# EAGLE board Bus Controller (EAGLE 5.03)
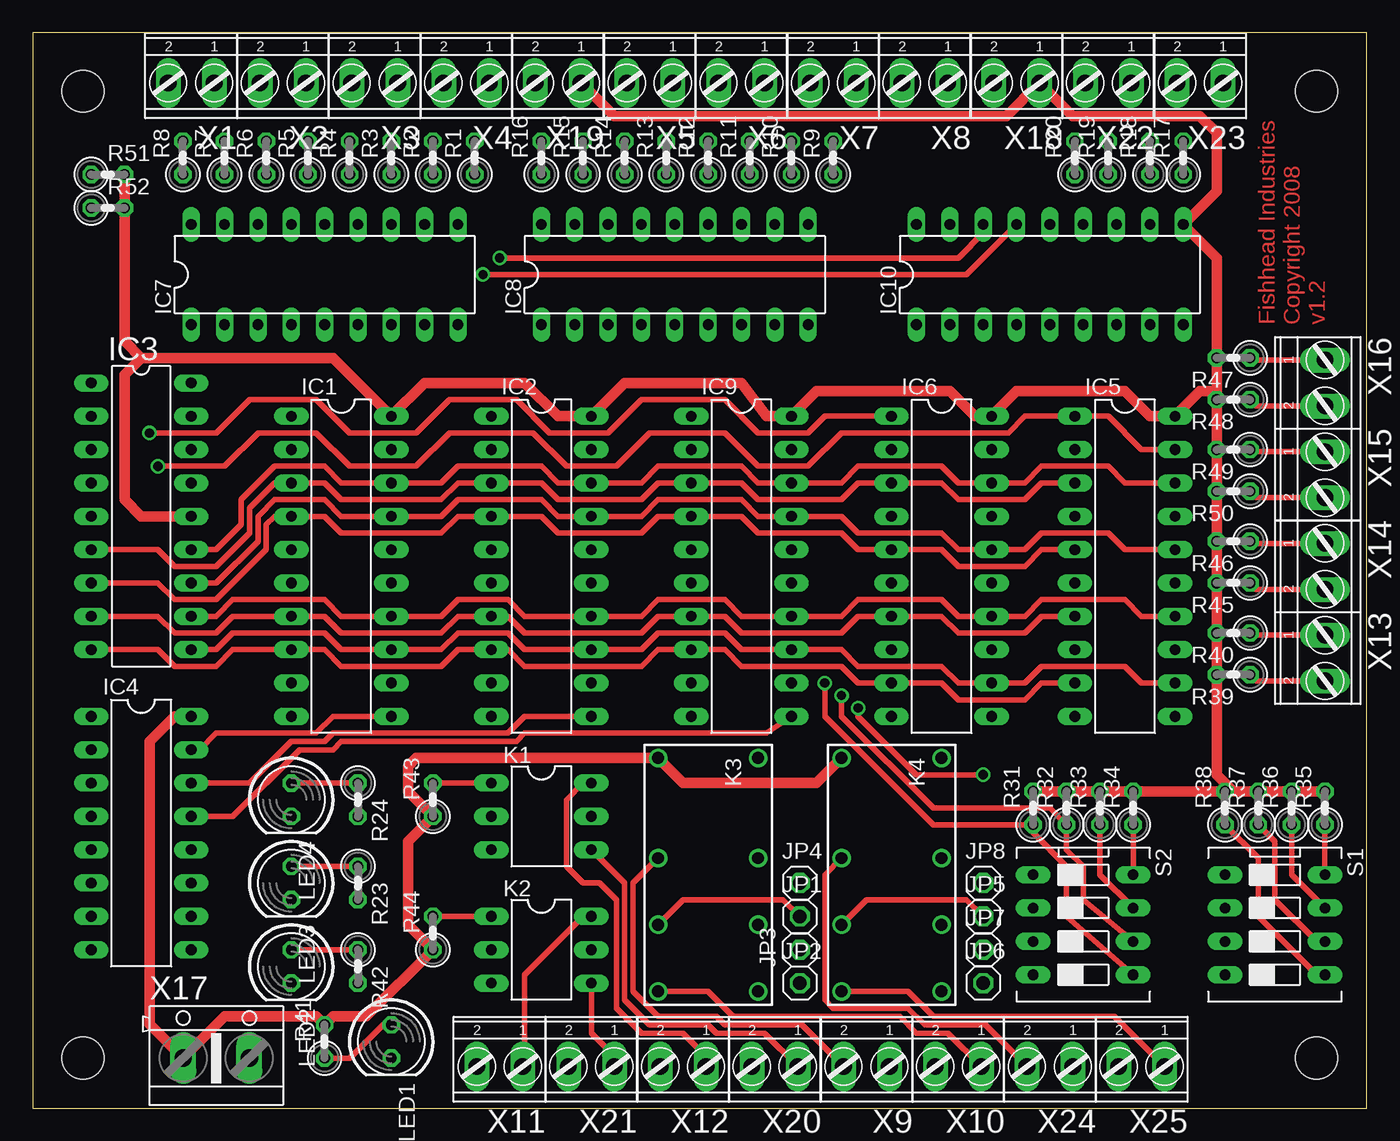
[diagram p0: board, top side]
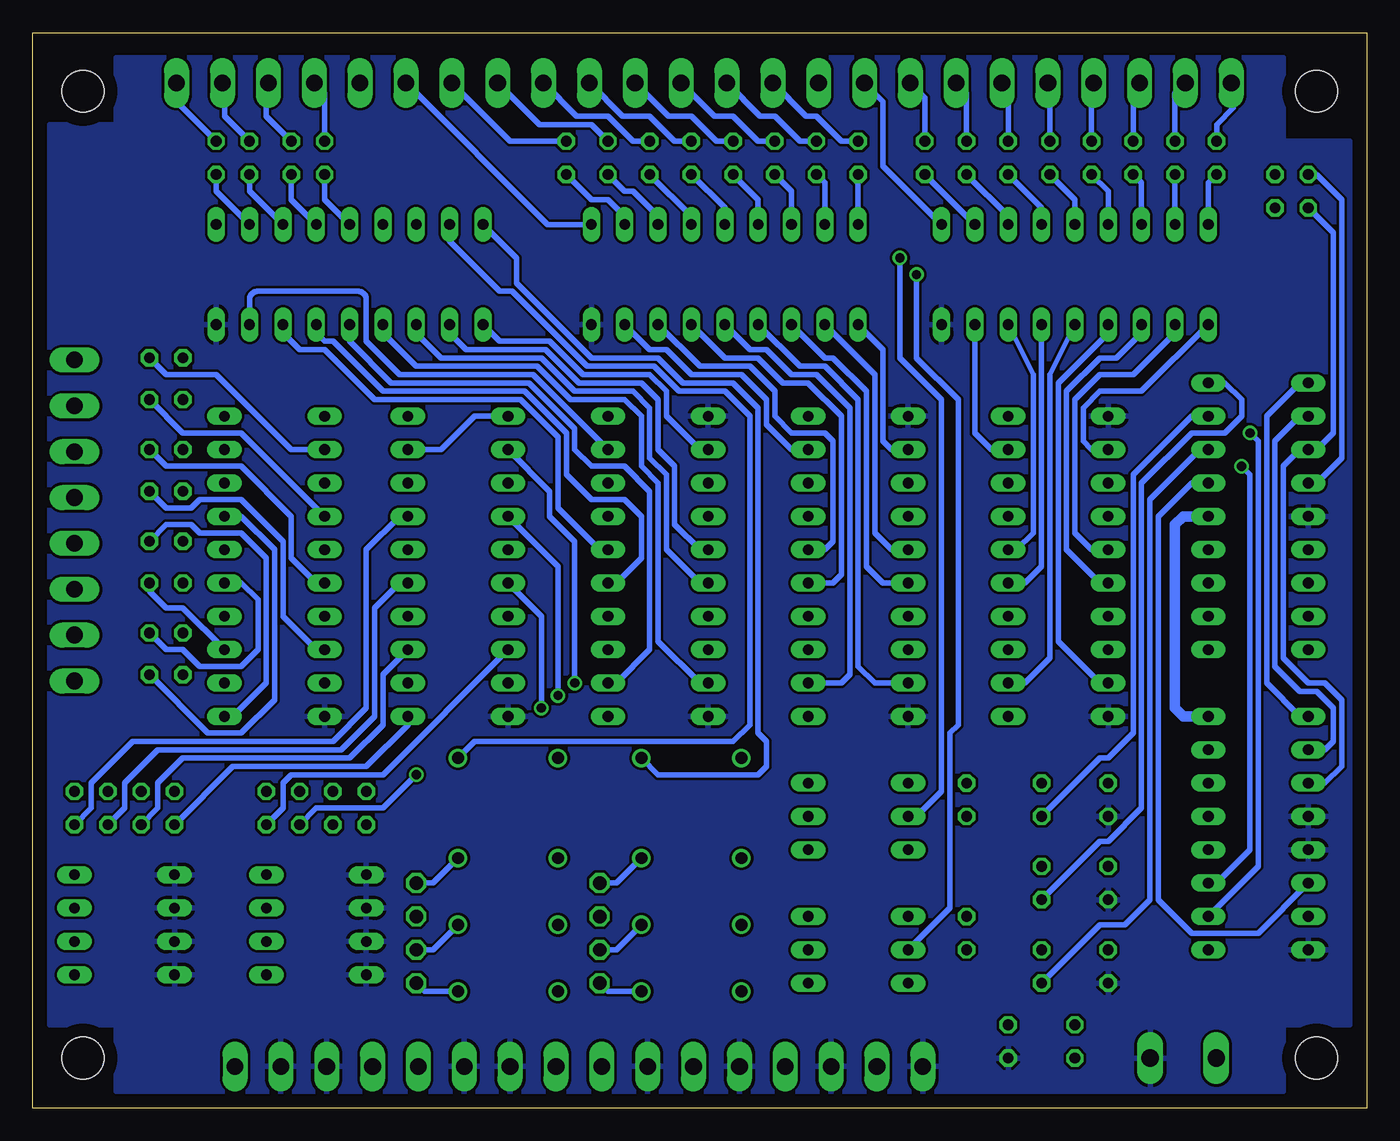
[diagram p1: board, bottom side, seen from below]

Size 101.6 x 81.92 mm. Coordinates in mm from the lower left corner, seen from the top.
Outline: 0,0 101.6,0 101.6,81.92 0,81.92 0,0
Copper layers (1*16): Top 0.035mm / dielectric 1.5mm / Bottom 0.035mm
Design rules "default *": minimum track width 10mil, minimum drill 24mil, track to track 8mil, track to pad 16mil, pad to pad 8mil, via to via 8mil, smd to smd 8mil, copper to edge 40mil, drill to drill 8mil, minimum pad ring 10mil, minimum via ring 8mil, stop-mask expansion 4mil, vias tented up to drill 0mil, thermal gap 10mil
Holes 3.2 mm at 3.81,3.81 97.79,3.81 97.79,77.47 3.81,77.47

## Footprints (pad centres in the part's own frame; a part is rotated, then mirrored left to right if it is on the bottom)
DIL20 = drill 0.813 long: 1 -11.43,-3.81; 2 -8.89,-3.81; 3 -6.35,-3.81; 4 -3.81,-3.81; 5 -1.27,-3.81; 6 1.27,-3.81; 7 3.81,-3.81; 8 6.35,-3.81; 9 8.89,-3.81; 10 11.43,-3.81; 11 11.43,3.81; 12 8.89,3.81; 13 6.35,3.81; 14 3.81,3.81; 15 1.27,3.81; 16 -1.27,3.81; 17 -3.81,3.81; 18 -6.35,3.81; 19 -8.89,3.81; 20 -11.43,3.81
DIL18 = drill 0.813 long: 1 -10.16,-3.81; 2 -7.62,-3.81; 3 -5.08,-3.81; 4 -2.54,-3.81; 5 0,-3.81; 6 2.54,-3.81; 7 5.08,-3.81; 8 7.62,-3.81; 9 10.16,-3.81; 10 10.16,3.81; 11 7.62,3.81; 12 5.08,3.81; 13 2.54,3.81; 14 0,3.81; 15 -2.54,3.81; 16 -5.08,3.81; 17 -7.62,3.81; 18 -10.16,3.81
DIL16 = drill 0.813 long: 1 -8.89,-3.81; 2 -6.35,-3.81; 3 -3.81,-3.81; 4 -1.27,-3.81; 5 1.27,-3.81; 6 3.81,-3.81; 7 6.35,-3.81; 8 8.89,-3.81; 9 8.89,3.81; 10 6.35,3.81; 11 3.81,3.81; 12 1.27,3.81; 13 -1.27,3.81; 14 -3.81,3.81; 15 -6.35,3.81; 16 -8.89,3.81
1X01 = drill 1.016 octagon: 1 0,0
DIL06 = drill 0.813 long: 1 -2.54,-3.81; 2 0,-3.81; 3 2.54,-3.81; 4 2.54,3.81; 5 0,3.81; 6 -2.54,3.81
DS2Y = drill 0.9 round: 1 -8.89,-3.81; 4 -1.27,-3.81; 6 3.81,-3.81; 8 8.89,-3.81; 9 8.89,3.81; 11 3.81,3.81; 13 -1.27,3.81; 16 -8.89,3.81
LED5MM = drill 0.813 octagon: A -1.27,0; K 1.27,0
0207/2V = drill 0.813 octagon: 1 -1.27,0; 2 1.27,0
DS-04 = drill 0.813 long: 1 -3.81,-3.81; 2 -1.27,-3.81; 3 1.27,-3.81; 4 3.81,-3.81; 5 3.81,3.81; 6 1.27,3.81; 7 -1.27,3.81; 8 -3.81,3.81
AK550/2 = drill 1.27 long: 1 -1.75,0; 2 1.75,0
AK500/2 = drill 1.321 long: 1 -2.515,0; 2 2.515,0

## Placement (x,y rotation side)
IC1  74LS374N  [DIL20]  23.5,41.27 270 top
IC2  74LS374N  [DIL20]  38.73,41.27 270 top
IC3  PIC16F628P  [DIL18]  8.26,45.09 270 top
IC4  74LS138N  [DIL16]  8.26,20.95 270 top
IC5  74S244N  [DIL20]  83.19,41.27 270 top
IC6  74S244N  [DIL20]  69.22,41.27 270 top
IC7  DRIVER1  [DIL18]  22.23,63.5 0 top
IC8  DRIVER2  [DIL18]  48.9,63.5 0 top
IC9  74LS374N  [DIL20]  53.98,41.27 270 top
IC10  DRIVER3  [DIL18]  77.47,63.5 0 top
JP1  R1_NC1  [1X01]  58.42,14.61 0 top
JP2  R1_NO2  [1X01]  58.42,9.53 0 top
JP3  R1_NC2  [1X01]  58.42,12.06 90 top
JP4  R1_COMMON2  [1X01]  58.42,17.14 0 top
JP5  R2_NC1  [1X01]  72.39,14.61 0 top
JP6  R2_NO2  [1X01]  72.39,9.53 0 top
JP7  R2_NC2  [1X01]  72.39,12.06 0 top
JP8  R2_COMMON2  [1X01]  72.39,17.14 0 top
K1  ISO1  [DIL06]  38.73,22.23 270 top
K2  ISO2  [DIL06]  38.73,12.06 270 top
K3  DS2Y-S-DC5V  [DS2Y]  51.44,17.78 270 top
K4  DS2Y-S-DC5V  [DS2Y]  65.41,17.78 270 top
LED1  POWER  [LED5MM]  27.3,5.08 270 top
LED2  STATUS  [LED5MM]  19.68,10.79 270 top
LED3  RUN 1  [LED5MM]  19.68,17.14 270 top
LED4  RUN 2  [LED5MM]  19.68,23.5 270 top
R1  220  [0207/2V]  33.66,72.39 90 top
R2  220  [0207/2V]  30.48,72.39 90 top
R3  220  [0207/2V]  27.3,72.39 90 top
R4  220  [0207/2V]  24.13,72.39 90 top
R5  220  [0207/2V]  20.95,72.39 90 top
R6  220  [0207/2V]  17.78,72.39 90 top
R7  220  [0207/2V]  14.61,72.39 90 top
R8  220  [0207/2V]  11.43,72.39 90 top
R9  220  [0207/2V]  60.96,72.39 90 top
R10  220  [0207/2V]  57.78,72.39 90 top
R11  220  [0207/2V]  54.61,72.39 90 top
R12  220  [0207/2V]  51.44,72.39 90 top
R13  220  [0207/2V]  48.26,72.39 90 top
R14  220  [0207/2V]  45.09,72.39 90 top
R15  220  [0207/2V]  41.91,72.39 90 top
R16  220  [0207/2V]  38.73,72.39 90 top
R17  220  [0207/2V]  87.63,72.39 90 top
R18  220  [0207/2V]  85.09,72.39 90 top
R19  220  [0207/2V]  81.92,72.39 90 top
R20  220  [0207/2V]  79.38,72.39 90 top
R23  220  [0207/2V]  24.77,17.14 270 top
R24  220  [0207/2V]  24.77,23.5 270 top
R31  4.7K  [0207/2V]  76.2,22.86 90 top
R32  4.7K  [0207/2V]  78.74,22.86 90 top
R33  4.7K  [0207/2V]  81.28,22.86 90 top
R34  4.7K  [0207/2V]  83.82,22.86 90 top
R35  4.7K  [0207/2V]  98.42,22.86 90 top
R36  4.7K  [0207/2V]  95.89,22.86 90 top
R37  4.7K  [0207/2V]  93.34,22.86 90 top
R38  4.7K  [0207/2V]  90.81,22.86 90 top
R39  4.7K  [0207/2V]  91.44,33.02 180 top
R40  4.7K  [0207/2V]  91.44,36.2 180 top
R41  220  [0207/2V]  22.23,5.08 90 top
R42  220  [0207/2V]  24.77,10.79 270 top
R43  220  [0207/2V]  30.48,23.5 90 top
R44  220  [0207/2V]  30.48,13.34 90 top
R45  4.7K  [0207/2V]  91.44,40.01 180 top
R46  4.7K  [0207/2V]  91.44,43.18 180 top
R47  4.7K  [0207/2V]  91.44,57.15 180 top
R48  4.7K  [0207/2V]  91.44,53.98 180 top
R49  4.7K  [0207/2V]  91.44,50.16 180 top
R50  4.7K  [0207/2V]  91.44,46.99 180 top
R51  4.7K  [0207/2V]  5.71,71.12 0 top
R52  4.7K  [0207/2V]  5.71,68.58 0 top
S1  MODE1  [DS-04]  94.61,13.97 270 top
S2  MODE2  [DS-04]  80.01,13.97 270 top
X1  OUT1  [AK550/2]  12.06,78.11 180 top
X2  OUT2  [AK550/2]  19.05,78.11 180 top
X3  OUT3  [AK550/2]  26.04,78.11 180 top
X4  OUT4  [AK550/2]  33.02,78.11 180 top
X5  OUT5  [AK550/2]  46.99,78.11 180 top
X6  OUT6  [AK550/2]  53.98,78.11 180 top
X7  OUT7  [AK550/2]  60.96,78.11 180 top
X8  OUT8  [AK550/2]  67.94,78.11 180 top
X9  SIG_IN1  [AK550/2]  63.5,3.17 180 top
X10  SIG_OUT1  [AK550/2]  70.48,3.17 180 top
X11  AC_IN2  [AK550/2]  35.56,3.17 180 top
X12  AC_IN1  [AK550/2]  49.53,3.17 180 top
X13  IN1  [AK550/2]  98.42,34.29 270 top
X14  IN2  [AK550/2]  98.42,41.27 270 top
X15  IN3  [AK550/2]  98.42,48.26 270 top
X16  IN4  [AK550/2]  98.42,55.24 270 top
X17  POWER  [AK500/2]  13.97,3.81 0 top
X18  OUT2_FB_CNTRL  [AK550/2]  74.93,78.11 180 top
X19  OUT1_FB_CNTRL  [AK550/2]  40.01,78.11 180 top
X20  ISO_1  [AK550/2]  56.52,3.17 180 top
X21  ISO_2  [AK550/2]  42.55,3.17 180 top
X22  OUT9  [AK550/2]  81.92,78.11 180 top
X23  OUT10  [AK550/2]  88.9,78.11 180 top
X24  SIG_IN2  [AK550/2]  77.47,3.17 180 top
X25  SIG_OUT2  [AK550/2]  84.45,3.17 180 top

## Library data of the parts
IC1 IC2 IC5 IC6 IC9 = 74xx-us
IC3 = microchip
IC4 = 74xx-eu
IC7 IC8 IC10 = uln-udn
JP1-JP8 = pinhead
K1-K4 = relay
LED1-LED4 = led
R1-R20 R23 R24 R31-R52 = resistor
S1 S2 = switch-dil
X1-X16 X18-X25 = con-ptr500+_v5
X17 = con-ptr500

## Nets
A0: IC3.1 IC4.1
A1: IC3.2 IC4.2
A2: IC3.3 IC4.3 R52.1
AC_IN1: K1.6 X12.1
AC_IN2: K2.6 X11.1
ADDR_EN: IC3.15 IC4.6
D0: IC1.3 IC2.3 IC3.6 IC5.3 IC6.3 IC9.3
D1: IC1.4 IC2.4 IC3.7 IC5.5 IC6.5 IC9.4
D2: IC1.7 IC2.7 IC3.8 IC5.7 IC6.7 IC9.7
D3: IC1.8 IC2.8 IC3.9 IC5.9 IC6.9 IC9.8
D4: IC1.13 IC2.13 IC3.10 IC5.12 IC6.12 IC9.13
D5: IC1.14 IC2.14 IC3.11 IC5.14 IC6.14 IC9.14
D6: IC1.17 IC2.17 IC3.12 IC5.16 IC6.16 IC9.17
D7: IC1.18 IC2.18 IC3.13 IC5.18 IC6.18 IC9.18
GND: IC1.1 IC1.10 IC2.1 IC2.10 IC3.5 IC4.4 IC4.5 IC4.8 IC5.10 IC6.10 IC7.9 IC8.9 IC9.1 IC9.10 IC10.9 LED1.K LED2.K LED3.K LED4.K S1.1 S1.2 S1.3 S1.4 S2.1 S2.2 S2.3 S2.4 X9.1 X10.2 X11.2 X12.2 X17.2 X20.2 X21.2 X24.1 X25.2
IN1: IC5.17 R39.1 X13.2
IN2: IC5.15 R40.1 X13.1
IN3: IC5.13 R45.1 X14.2
IN4: IC5.11 R46.1 X14.1
IN5: IC5.8 R50.1 X15.2
IN6: IC5.6 R49.1 X15.1
IN7: IC5.4 R48.1 X16.2
IN8: IC5.2 R47.1 X16.1
IN9: IC6.17 R35.1 S1.8
IN10: IC6.15 R36.1 S1.7
IN11: IC6.13 R37.1 S1.6
IN12: IC6.11 R38.1 S1.5
IN13: IC6.8 R34.1 S2.8
IN14: IC6.6 R33.1 S2.7
IN15: IC6.4 R32.1 S2.6
IN16: IC6.2 R31.1 S2.5
ISO_OUT1: K1.4 X20.1
ISO_OUT2: K2.4 X21.1
N$1: IC7.10 X19.2
N$2: IC3.4 R51.1
N$3: IC4.13 IC9.11
N$4: IC7.12 R2.1
N$5: IC2.11 IC4.14
N$6: IC1.11 IC4.15
N$7: IC9.19 IC10.8
N$8: IC9.16 IC10.7
N$9: IC9.15 IC10.6
N$10: IC9.12 IC10.5
N$11: IC9.9 IC10.4
N$12: IC7.18 R8.1
N$13: IC7.17 R7.1
N$14: IC7.16 R6.1
N$15: IC7.15 R5.1
N$16: IC9.6 IC10.3
N$17: IC8.12 R10.1
N$18: IC9.5 IC10.2
N$19: IC9.2 IC10.1
N$20: IC1.16 IC7.7
N$21: IC7.14 R4.1
N$22: IC1.19 IC7.8
N$23: IC1.2 IC7.1
N$24: IC1.5 IC7.2
N$25: IC1.6 IC7.3
N$26: IC1.9 IC7.4
N$27: IC1.12 IC7.5
N$28: IC1.15 IC7.6
N$29: IC2.19 IC8.8
N$30: IC7.13 R3.1
N$31: IC2.16 IC8.7
N$32: IC7.11 R1.1
N$33: IC2.15 IC8.6
N$34: IC10.16 K1.2
N$35: IC10.15 K2.2
N$37: LED4.A R24.1
N$38: LED3.A R23.1
N$44: IC8.10 X18.2
N$55: IC2.2 IC8.1
N$56: IC2.5 IC8.2
N$57: IC2.6 IC8.3
N$58: IC2.9 IC8.4
N$59: IC2.12 IC8.5
N$61: IC8.18 R16.1
N$62: IC8.17 R15.1
N$63: IC8.16 R14.1
N$64: IC8.15 R13.1
N$65: IC8.14 R12.1
N$66: IC8.13 R11.1
N$68: IC8.11 R9.1
N$71: LED1.A R41.1
N$75: IC10.14 R20.1
N$76: IC10.13 R19.1
N$77: IC10.12 R18.1
N$78: IC10.11 R17.1
N$105: IC4.10 IC6.1 IC6.19
N$106: LED2.A R42.1
N$107: K1.1 R43.2
N$108: K2.1 R44.2
N$109: IC4.11 IC5.1 IC5.19
OUT1: R8.2 X1.2
OUT2: R7.2 X1.1
OUT3: R6.2 X2.2
OUT4: R5.2 X2.1
OUT5: R4.2 X3.2
OUT6: R3.2 X3.1
OUT7: R2.2 X4.2
OUT8: R1.2 X4.1
OUT9: R16.2 X5.2
OUT10: R15.2 X5.1
OUT11: R14.2 X6.2
OUT12: R13.2 X6.1
OUT13: R12.2 X7.2
OUT14: R11.2 X7.1
OUT15: R10.2 X8.2
OUT16: R9.2 X8.1
OUT17: IC10.18 K3.16
OUT18: IC10.17 K4.16
OUT21: R20.2 X22.2
OUT22: R19.2 X22.1
OUT23: R18.2 X23.2
OUT24: R17.2 X23.1
R1_COMMON1: K3.4 X9.2
R1_COMMON2: JP4.1 K3.13
R1_COMMON3: JP8.1 K4.13
R1_COMMON4: K4.4 X24.2
R1_NC1: JP1.1 K3.6
R1_NC2: JP3.1 K3.11
R1_NC3: JP5.1 K4.6
R1_NC4: JP7.1 K4.11
R1_NO1: K3.8 X10.1
R1_NO2: JP2.1 K3.9
R1_NO3: JP6.1 K4.9
R1_NO4: K4.8 X25.1
RUN1: IC3.18 R23.2
RUN2: IC3.17 R24.2
STATUS: IC3.16 R42.2
VCC: IC1.20 IC2.20 IC3.14 IC4.16 IC5.20 IC6.20 IC9.20 IC10.10 K3.1 K4.1 R31.2 R32.2 R33.2 R34.2 R35.2 R36.2 R37.2 R38.2 R39.2 R40.2 R41.2 R43.1 R44.1 R45.2 R46.2 R47.2 R48.2 R49.2 R50.2 R51.2 R52.2 X17.1 X18.1 X19.1

## Tracks (layer width: path | path; a pad name or v marks a point on that pad's centre or on a via)
A0
  Bottom 0.406: IC4.1 5.08,29.84 7.62,32.38 7.62,52.7 5.08,55.24 IC3.1
A1
  Bottom 0.406: IC4.2 3.17,27.3 2.54,27.94 2.54,30.48 3.81,31.75 5.08,31.75 6.99,33.66 6.99,50.8 5.08,52.7 IC3.2
A2
  Bottom 0.406: IC4.3 3.17,24.77 1.91,26.04 1.91,31.11 3.17,32.38 4.45,32.38 6.35,34.29 6.35,48.9 5.08,50.16 IC3.3 3.81,50.16 2.54,51.44 2.54,66.67 R52.1
AC_IN1
  Top 0.406: K1.6 41.91,24.77 40.64,23.5 40.64,18.41 41.91,17.14 43.18,17.14 44.45,15.88 44.45,7.62 46.35,5.71 49.53,5.71 51.28,3.96 X12.1
AC_IN2
  Top 0.406: K2.6 41.91,14.61 37.47,10.16 37.47,3.17 X11.1
ADDR_EN
  Bottom 0.406: IC4.6 8.26,13.34 13.34,13.34 15.88,15.88 15.88,45.09 13.34,47.62 IC3.15
D0
  Top 0.406: IC5.3 76.83,47.62 75.56,46.35 70.48,46.35 69.22,47.62 IC6.3 62.87,47.62 61.59,46.35 55.24,46.35 53.98,47.62 IC9.3 47.62,47.62 46.35,46.35 40.01,46.35 38.73,47.62 IC2.3 32.38,47.62 31.11,46.35 23.5,46.35 22.23,47.62 IC1.3 18.41,47.62 16.51,45.72 16.51,43.81 13.97,41.27 10.79,41.27 9.53,42.55 IC3.6
D1
  Top 0.406: IC5.5 76.83,42.55 75.56,41.27 70.48,41.27 69.22,42.55 IC6.5 62.87,42.55 61.59,43.81 55.24,43.81 53.98,45.09 IC9.4 47.62,45.09 46.35,43.81 40.01,43.81 38.73,45.09 IC2.4 32.38,45.09 31.11,43.81 23.5,43.81 22.23,45.09 IC1.4 18.41,45.09 17.78,44.45 17.78,42.55 13.97,38.73 10.79,38.73 9.53,40.01 IC3.7
D2
  Top 0.406: IC5.7 76.83,37.47 75.56,36.2 70.48,36.2 69.22,37.47 IC6.7 62.87,37.47 61.59,36.2 53.98,36.2 52.7,37.47 IC9.7 47.62,37.47 46.35,36.2 37.47,36.2 36.2,37.47 IC2.7 32.38,37.47 31.11,36.2 23.5,36.2 22.23,37.47 IC1.7 15.24,37.47 13.97,36.2 10.79,36.2 9.53,37.47 IC3.8
D3
  Top 0.406: IC5.9 76.83,32.38 75.56,31.11 70.48,31.11 69.22,32.38 IC6.9 62.87,32.38 61.59,33.66 53.98,33.66 52.7,34.92 IC9.8 47.62,34.92 46.35,33.66 37.47,33.66 36.2,34.92 IC2.8 32.38,34.92 31.11,33.66 23.5,33.66 22.23,34.92 IC1.8 15.24,34.92 13.97,33.66 10.79,33.66 9.53,34.92 IC3.9
D4
  Top 0.406: IC5.12 84.45,32.38 83.19,33.66 76.83,33.66 75.56,32.38 IC6.12 70.48,32.38 69.22,33.66 62.87,33.66 61.59,34.92 IC9.13 53.98,34.92 52.7,36.2 47.62,36.2 46.35,34.92 IC2.13 37.47,34.92 36.2,36.2 32.38,36.2 31.11,34.92 IC1.13 23.5,34.92 22.23,36.2 15.24,36.2 13.97,34.92 IC3.10
D5
  Top 0.406: 75.56,37.47 IC6.14 | 75.56,37.47 76.83,38.73 83.19,38.73 84.45,37.47 IC5.14 | 75.56,37.47 70.48,37.47 69.22,38.73 62.87,38.73 61.59,37.47 IC9.14 53.98,37.47 52.7,38.73 47.62,38.73 46.35,37.47 IC2.14 37.47,37.47 36.2,38.73 32.38,38.73 31.11,37.47 IC1.14 23.5,37.47 22.23,38.73 15.24,38.73 13.97,37.47 IC3.11
D6
  Top 0.406: IC5.16 83.19,42.55 81.92,43.81 76.83,43.81 75.56,42.55 IC6.16 70.48,42.55 69.22,43.81 62.87,43.81 61.59,45.09 IC9.17 55.24,45.09 53.98,46.35 47.62,46.35 46.35,45.09 IC2.17 40.01,45.09 38.73,46.35 32.38,46.35 31.11,45.09 IC1.17 23.5,45.09 22.23,46.35 18.41,46.35 17.14,45.09 17.14,43.18 13.97,40.01 IC3.12
D7
  Top 0.406: IC5.18 83.19,47.62 81.92,48.9 76.83,48.9 75.56,47.62 IC6.18 70.48,47.62 69.22,48.9 62.87,48.9 61.59,47.62 IC9.18 55.24,47.62 53.98,48.9 47.62,48.9 46.35,47.62 IC2.18 40.01,47.62 38.73,48.9 32.38,48.9 31.11,47.62 IC1.18 23.5,47.62 22.23,48.9 19.05,48.9 18.41,48.9 15.88,46.35 15.88,44.45 13.97,42.55 IC3.13
GND
  pour Bottom: 1.27,73.66 6.35,73.66 6.35,80.01 95.25,80.01 95.25,74.93 100.33,74.93 100.33,6.35 95.25,6.35 95.25,1.27 6.35,1.27 6.35,6.35 1.27,6.35
IN1
  Top 0.406: X13.2 93.19,32.54 R39.1
  Bottom 0.406: IC5.17 85.72,45.09 83.19,42.55 83.19,31.11 85.72,28.57 88.27,28.57 R39.1
IN2
  Top 0.406: X13.1 92.86,36.04 R40.1
  Bottom 0.406: IC5.15 85.72,40.01 84.45,38.73 84.45,34.92 85.72,33.66 88.9,33.66 90.17,34.92 91.44,34.92 R40.1
IN3
  Top 0.406: X14.2 93.19,39.52 R45.1
  Bottom 0.406: IC5.13 90.17,38.1 91.44,38.1 92.71,39.37 R45.1
IN4
  Top 0.406: X14.1 92.86,43.02 R46.1
  Bottom 0.406: IC5.11 86.36,29.84 83.82,32.38 83.82,41.91 85.72,43.81 88.9,43.81 89.53,44.45 91.44,44.45 R46.1
IN5
  Top 0.406: X15.2 93.19,46.51 R50.1
  Bottom 0.406: IC5.8 80.01,34.92 82.55,37.47 82.55,43.18 85.72,46.35 88.9,46.35 89.53,45.72 91.44,45.72 R50.1
IN6
  Top 0.406: X15.1 92.86,50.01 R49.1
  Bottom 0.406: IC5.6 80.01,40.01 81.92,41.91 81.92,45.09 85.72,48.9 91.44,48.9 R49.1
IN7
  Top 0.406: X16.2 93.19,53.49 R48.1
  Bottom 0.406: IC5.4 85.72,51.44 90.17,51.44 R48.1
IN8
  Top 0.406: X16.1 92.86,56.99 R47.1
  Bottom 0.406: IC5.2 81.92,50.16 87.63,55.88 91.44,55.88 R47.1
IN9
  Top 0.406: R35.1 S1.8
  Bottom 0.406: IC6.17 73.66,45.09 76.2,42.55 76.2,30.48 78.74,27.94 93.98,27.94 97.16,24.77 97.16,22.86 R35.1
IN10
  Top 0.406: S1.7 95.89,17.78 R36.1
  Bottom 0.406: IC6.15 73.66,40.01 75.56,38.1 75.56,29.84 78.11,27.3 92.08,27.3 94.61,24.77 94.61,22.86 R36.1
IN11
  Top 0.406: S1.6 97.79,12.7 94.61,15.88 94.61,20.32 R37.1
  Bottom 0.406: IC6.13 74.93,33.02 74.93,29.21 77.47,26.67 90.17,26.67 92.08,24.77 92.08,22.86 R37.1
IN12
  Top 0.406: S1.5 97.79,10.16 93.34,14.61 93.34,19.05 R38.1
  Bottom 0.406: IC6.11 73.03,29.21 76.2,26.04 86.36,26.04 R38.1
IN13
  Top 0.406: R34.1 S2.8
  Bottom 0.406: R34.1 82.55,22.86 82.55,24.77 81.92,25.4 74.93,25.4 IC6.8
IN14  (via drill 0.7)
  Top 0.406: v72.39,25.4 67.31,25.4 62.87,29.84 v62.87,30.48 | R33.1 81.28,17.78 S2.7
  Bottom 0.406: R33.1 80.01,22.86 74.93,22.86 v72.39,25.4 | IC6.6 62.87,37.47 v62.87,30.48
IN15  (via drill 0.7)
  Top 0.406: v61.59,31.43 61.59,29.84 68.58,22.86 77.47,22.86 R32.1 78.74,19.68 80.01,18.41 80.01,15.88 S2.6
  Bottom 0.406: IC6.4 61.59,41.27 v61.59,31.43
IN16  (via drill 0.7)
  Top 0.406: v60.33,32.38 60.33,29.84 68.58,21.59 R31.1 76.2,20.95 78.74,18.41 78.74,14.61 S2.5
  Bottom 0.406: IC6.2 62.23,46.99 62.23,45.09 60.33,43.18 v60.33,32.38
ISO_OUT1
  Top 0.406: K1.4 45.09,17.14 45.09,8.26 46.99,6.35 51.44,6.35 52.07,5.71 55.73,5.71 X20.1
ISO_OUT2
  Top 0.406: K2.4 42.55,5.71 44.3,3.96 X21.1
N$1
  Bottom 0.406: IC7.10 36.83,71.75 36.83,76.68 X19.2
N$2
  Bottom 0.406: IC3.4 3.81,47.62 1.91,49.53 1.91,69.22 3.81,71.12 R51.1
N$3
  Top 0.406: IC4.13 15.24,22.23 20.32,27.3 22.86,27.3 23.5,27.94 36.83,27.94 37.47,28.57 55.88,28.57 IC9.11
N$4
  Bottom 0.406: IC7.12 27.3,67.94 R2.1
N$5
  Top 0.406: IC4.14 16.51,24.77 19.68,27.94 22.23,27.94 22.86,28.57 36.2,28.57 37.47,29.84 IC2.11
N$6
  Top 0.406: IC4.15 12.7,27.3 13.97,28.57 21.59,28.57 22.86,29.84 IC1.11
N$7
  Bottom 0.406: IC10.8 85.09,61.59 arc90 84.45,62.23 76.83,62.23 arc90 76.2,61.59 76.2,58.42 73.66,55.88 63.5,55.88 IC9.19
N$8
  Bottom 0.406: IC9.16 58.42,42.55 61.59,45.72 61.59,51.12 64.45,53.98 75.56,53.98 79.38,57.78 81.28,57.78 82.55,59.05 IC10.7
N$9
  Bottom 0.406: IC9.15 57.15,40.01 55.24,41.91 55.24,45.09 56.52,46.35 59.05,46.35 60.96,48.26 60.96,51.44 64.14,54.61 74.93,54.61 78.74,58.42 79.38,58.42 80.01,59.05 IC10.6
N$10
  Bottom 0.406: IC10.5 77.47,58.42 74.3,55.24 63.82,55.24 60.33,51.75 60.33,50.16 59.05,48.9 56.52,48.9 54.61,46.99 54.61,34.92 57.15,32.38 IC9.12
N$11
  Bottom 0.406: IC9.9 50.8,32.38 53.98,35.56 53.98,47.62 55.24,48.9 55.24,52.7 56.52,53.98 60.64,53.98 63.18,56.52 72.39,56.52 74.93,59.05 IC10.4
N$12
  Bottom 0.406: IC7.18 12.06,70.48 R8.1
N$13
  Bottom 0.406: IC7.17 R7.1
N$14
  Bottom 0.406: IC7.16 17.14,70.48 R6.1
N$15
  Bottom 0.406: IC7.15 19.68,69.85 R5.1
N$16
  Bottom 0.406: IC9.6 50.8,40.01 53.34,42.55 53.34,48.26 54.61,49.53 54.61,53.34 55.88,54.61 60.33,54.61 62.87,57.15 70.48,57.15 72.39,59.05 IC10.3
N$17
  Bottom 0.406: IC8.12 53.98,67.94 55.88,69.85 56.52,69.85 R10.1
N$18
  Bottom 0.406: IC10.2 69.85,59.05 68.58,57.78 62.55,57.78 60.01,55.24 55.24,55.24 53.98,53.98 53.98,50.16 52.7,48.9 52.7,44.45 50.8,42.55 IC9.5
N$19
  Bottom 0.406: IC10.1 66.04,58.42 62.23,58.42 59.69,55.88 54.61,55.88 53.34,54.61 53.34,52.7 50.8,50.16 IC9.2
N$20
  Bottom 0.406: IC1.16 26.67,42.55 25.4,43.81 25.4,55.88 IC7.7
N$21
  Bottom 0.406: IC7.14 22.23,69.22 R4.1
N$22
  Bottom 0.406: IC1.19 28.57,50.16 29.84,51.44 IC7.8
N$23
  Bottom 0.406: IC1.2 20.95,50.16 21.59,50.8 21.59,53.34 20.32,54.61 17.14,54.61 IC7.1
N$24
  Bottom 0.406: IC1.5 20.95,42.55 22.23,43.81 22.23,53.98 20.32,55.88 17.78,55.88 14.61,59.05 IC7.2
N$25
  Bottom 0.406: IC1.6 20.32,40.01 22.86,42.55 22.86,54.61 20.32,57.15 19.05,57.15 17.14,59.05 IC7.3
N$26
  Bottom 0.406: IC1.9 20.32,32.38 23.5,35.56 23.5,55.24 19.68,59.05 IC7.4
N$27
  Bottom 0.406: IC1.12 26.04,32.38 24.13,34.29 24.13,55.88 IC7.5
N$28
  Bottom 0.406: IC1.15 26.04,40.01 24.77,41.27 IC7.6
N$29
  Bottom 0.406: IC2.19 43.81,50.16 45.72,52.07 45.72,53.98 47.62,55.88 51.44,55.88 53.34,57.78 54.61,57.78 IC8.8
N$30
  Bottom 0.406: IC7.13 24.77,68.58 R3.1
N$31
  Bottom 0.406: IC2.16 41.27,42.55 40.64,43.18 40.64,50.8 41.27,51.44 43.81,51.44 45.09,52.7 45.09,54.61 46.99,56.52 50.8,56.52 IC8.7
N$32
  Bottom 0.406: IC7.11 R1.1
N$33
  Bottom 0.406: IC2.15 40.64,40.01 40.01,40.64 40.01,52.7 42.55,55.24 44.45,55.24 46.35,57.15 48.9,57.15 IC8.6
N$34  (via drill 0.7)
  Top 0.406: IC10.16 72.39,66.67 70.48,64.77 v35.56,64.77
  Bottom 0.406: v35.56,64.77 35.56,57.15 32.38,53.98 32.38,24.13 34.29,22.23 K1.2
N$35  (via drill 0.7)
  Top 0.406: IC10.15 71.12,63.5 v34.29,63.5
  Bottom 0.406: v34.29,63.5 34.29,57.15 31.11,53.98 31.11,29.21 31.75,28.57 31.75,15.24 K2.2
N$37
  Top 0.406: R24.1 LED4.A
N$38
  Top 0.406: R23.1 LED3.A
N$44
  Bottom 0.406: IC8.10 62.38,67.31 X18.2
N$55
  Bottom 0.406: IC2.2 36.2,50.16 36.83,50.8 36.83,57.78 IC8.1
N$56
  Bottom 0.406: IC2.5 36.2,42.55 37.47,43.81 37.47,55.88 IC8.2
N$57
  Bottom 0.406: IC2.6 36.83,40.01 38.1,41.27 38.1,54.61 40.64,57.15 41.27,57.15 IC8.3
N$58
  Bottom 0.406: IC2.9 37.47,32.38 38.73,33.66 38.73,53.98 41.27,56.52 43.18,56.52 IC8.4
N$59
  Bottom 0.406: IC2.12 40.01,32.38 39.37,33.02 39.37,53.34 41.91,55.88 43.81,55.88 45.72,57.78 46.99,57.78 IC8.5
N$61
  Bottom 0.406: IC8.18 R16.1
N$62
  Bottom 0.406: IC8.17 41.27,70.48 R15.1
N$63
  Bottom 0.406: IC8.16 43.81,69.85 R14.1
N$64
  Bottom 0.406: IC8.15 46.35,69.22 R13.1
N$65
  Bottom 0.406: IC8.14 48.9,68.58 R12.1
N$66
  Bottom 0.406: IC8.13 51.44,67.94 R11.1
N$68
  Bottom 0.406: IC8.11 56.52,67.94 57.78,69.22 59.05,69.22 R9.1
N$71
  Top 0.406: LED1.A 26.67,6.35 24.13,3.81 R41.1
N$75
  Bottom 0.406: IC10.14 79.38,69.22 R20.1
N$76
  Bottom 0.406: IC10.13 81.92,69.22 R19.1
N$77
  Bottom 0.406: IC10.12 85.09,69.85 R18.1
N$78
  Bottom 0.406: IC10.11 87.63,69.85 R17.1
N$105  (via drill 0.7)
  Top 0.406: IC6.1 60.33,52.7 59.05,51.44 55.24,51.44 52.7,53.98 46.35,53.98 43.81,51.44 39.37,51.44 36.83,53.98 31.75,53.98 29.21,51.44 24.13,51.44 21.59,53.98 16.51,53.98 13.97,51.44 v8.89,51.44
  Bottom 0.406: IC6.19 70.48,50.16 67.94,52.7 IC6.1 | IC4.10 8.26,18.41 8.26,50.8 v8.89,51.44
N$106
  Top 0.406: R42.1 LED2.A
N$107
  Top 0.406: R43.2 K1.1
N$108
  Top 0.406: R44.2 K2.1
N$109  (via drill 0.7)
  Top 0.406: IC5.19 84.45,50.16 81.92,52.7 IC5.1 75.56,52.7 74.3,51.44 61.59,51.44 59.05,48.9 55.24,48.9 52.7,51.44 46.99,51.44 44.45,48.9 40.64,48.9 38.1,51.44 31.75,51.44 29.21,48.9 24.13,48.9 21.59,51.44 17.14,51.44 14.61,48.9 v9.53,48.9
  Bottom 0.406: IC4.11 11.43,17.14 8.89,19.68 8.89,48.26 v9.53,48.9
OUT1
  Bottom 0.406: R8.2 11.43,74.93 10.16,76.2 10.16,77.95 X1.2
OUT2
  Bottom 0.406: R7.2 14.61,77.31 X1.1
OUT3
  Bottom 0.406: R6.2 17.78,77.62 X2.2
OUT4
  Bottom 0.406: R5.2 20.95,77.95 X2.1
OUT5
  Bottom 0.406: R4.2 24.13,77.95 X3.2
OUT6
  Bottom 0.406: R3.2 27.3,77.62 X3.1
OUT7
  Bottom 0.406: R2.2 30.48,77.31 X4.2
OUT8
  Bottom 0.406: R1.2 33.66,76.99 X4.1
OUT9
  Bottom 0.406: R16.2 40.01,73.66 41.91,75.56 42.7,75.56 X5.2
OUT10
  Bottom 0.406: R15.2 43.18,73.66 45.09,75.56 46.2,75.56 X5.1
OUT11
  Bottom 0.406: R14.2 46.35,73.66 48.26,75.56 49.69,75.56 X6.2
OUT12
  Bottom 0.406: R13.2 49.53,73.66 51.44,75.56 53.19,75.56 X6.1
OUT13
  Bottom 0.406: R12.2 52.7,73.66 54.61,75.56 56.67,75.56 X7.2
OUT14
  Bottom 0.406: R11.2 55.88,73.66 57.78,75.56 60.17,75.56 X7.1
OUT15
  Bottom 0.406: R10.2 59.05,74.93 63.02,74.93 X8.2
OUT16
  Bottom 0.406: R9.2 65.25,73.66 X8.1
OUT17
  Bottom 0.406: IC10.18 64.77,64.77 64.77,62.87 59.05,57.15 53.98,57.15 52.07,55.24 48.26,55.24 46.35,53.34 46.35,28.57 45.72,27.94 45.72,26.04 46.35,25.4 53.98,25.4 K3.16
OUT18
  Bottom 0.406: IC10.17 69.85,66.04 66.04,62.23 65.09,62.23 59.37,56.52 54.29,56.52 52.39,54.61 48.9,54.61 46.99,52.7 46.99,29.21 48.26,27.94 67.94,27.94 K4.16
OUT21
  Bottom 0.406: R20.2 79.38,77.31 X22.2
OUT22
  Bottom 0.406: R19.2 83.82,75.56 83.82,77.95 X22.1
OUT23
  Bottom 0.406: R18.2 87,75.56 87,77.95 X23.2
OUT24
  Bottom 0.406: R17.2 90.81,76.83 90.81,77.95 X23.1
R1_COMMON1
  Top 0.406: K3.4 45.72,17.14 45.72,8.89 47.62,6.99 52.07,6.99 52.7,6.35 58.58,6.35 X9.2
R1_COMMON2
  Bottom 0.406: K3.13 57.15,17.14 JP4.1
R1_COMMON3
  Bottom 0.406: K4.13 71.12,17.14 JP8.1
R1_COMMON4
  Top 0.406: K4.4 60.33,17.78 60.33,8.26 60.96,7.62 66.67,7.62 67.94,6.35 72.55,6.35 X24.2
R1_NC1
  Top 0.406: K3.6 49.53,15.88 57.15,15.88 JP1.1
R1_NC2
  Bottom 0.406: K3.11 57.15,12.06 JP3.1
R1_NC3
  Top 0.406: K4.6 63.5,15.88 71.12,15.88 JP5.1
R1_NC4
  Bottom 0.406: K4.11 71.12,12.06 JP7.1
R1_NO1
  Top 0.406: K3.8 51.44,8.89 53.34,6.99 66.04,6.99 67.31,5.71 69.69,5.71 X10.1
R1_NO2
  Bottom 0.406: K3.9 57.78,8.89 JP2.1
R1_NO3
  Bottom 0.406: K4.9 71.75,8.89 JP6.1
R1_NO4
  Top 0.406: K4.8 66.67,8.89 68.58,6.99 82.39,6.99 X25.1
RUN1
  Bottom 0.406: IC3.18 10.79,55.24 9.53,53.98 9.53,52.7 10.79,51.44 13.34,51.44 17.14,47.62 17.14,22.86 19.68,20.32 20.32,20.32 R23.2
RUN2
  Bottom 0.406: IC3.17 13.34,52.7 17.78,48.26 17.78,28.57 19.68,26.67 20.32,26.67 R24.2
STATUS
  Bottom 0.406: IC3.16 12.7,50.16 16.51,46.35 16.51,15.88 18.41,13.97 20.32,13.97 R42.2
VCC
  Top 0.813: R31.2 R32.2 R33.2 R34.2 R38.2 91.44,24.13 | 91.44,24.13 R37.2 R36.2 R35.2 | IC4.16 10.79,29.84 8.89,27.94 8.89,6.38 X17.1 11.43,3.81 14.61,6.99 21.59,6.99 R41.2 22.86,6.99 25.4,6.99 R44.1 28.57,13.97 28.57,20.32 R43.1 28.57,24.13 28.57,26.04 29.21,26.67 K3.1 49.53,24.77 59.69,24.77 K4.1 | 11.43,45.09 IC3.14 8.26,45.09 6.99,46.35 6.99,55.88 8.26,57.15 | R51.2 R52.2 6.99,58.42 8.26,57.15 | 8.26,57.15 22.86,57.15 IC1.20 29.84,55.24 37.47,55.24 40.01,52.7 IC2.20 45.09,55.24 53.98,55.24 55.88,52.7 IC9.20 59.69,54.61 69.85,54.61 71.75,52.7 IC6.20 74.93,54.61 83.19,54.61 85.09,52.7 IC5.20 88.9,54.61 90.17,54.61 | 90.17,54.61 R47.2 90.17,64.77 IC10.10 90.17,69.85 90.17,74.3 88.9,75.56 79.22,75.56 X18.1 74.14,75.56 44.3,75.56 X19.1 | 90.17,54.61 R48.2 R49.2 R50.2 R46.2 R45.2 R40.2 R39.2 90.17,25.4 91.44,24.13
  Bottom 0.813: IC4.16 13.97,29.84 14.61,30.48 14.61,44.45 13.97,45.09 IC3.14 12.7,45.09

## Text on the board
Top: Fishhead Industries | Copyright 2008 | v1.2